# Altium PCB waffling60-SE.PcbDoc (part 2 of 2)
Units mm, origin at the board's own origin, x right, y up, seen from the top; angles counter-clockwise.
Board outline 283.9 x 96.45 mm, 2 copper layers (Component Side, Bottom Layer), stack 1.571 mm thick; 161 components, 102 nets, 768 pads, 77 vias.
Unrouted connection lines stored in the file: 5.
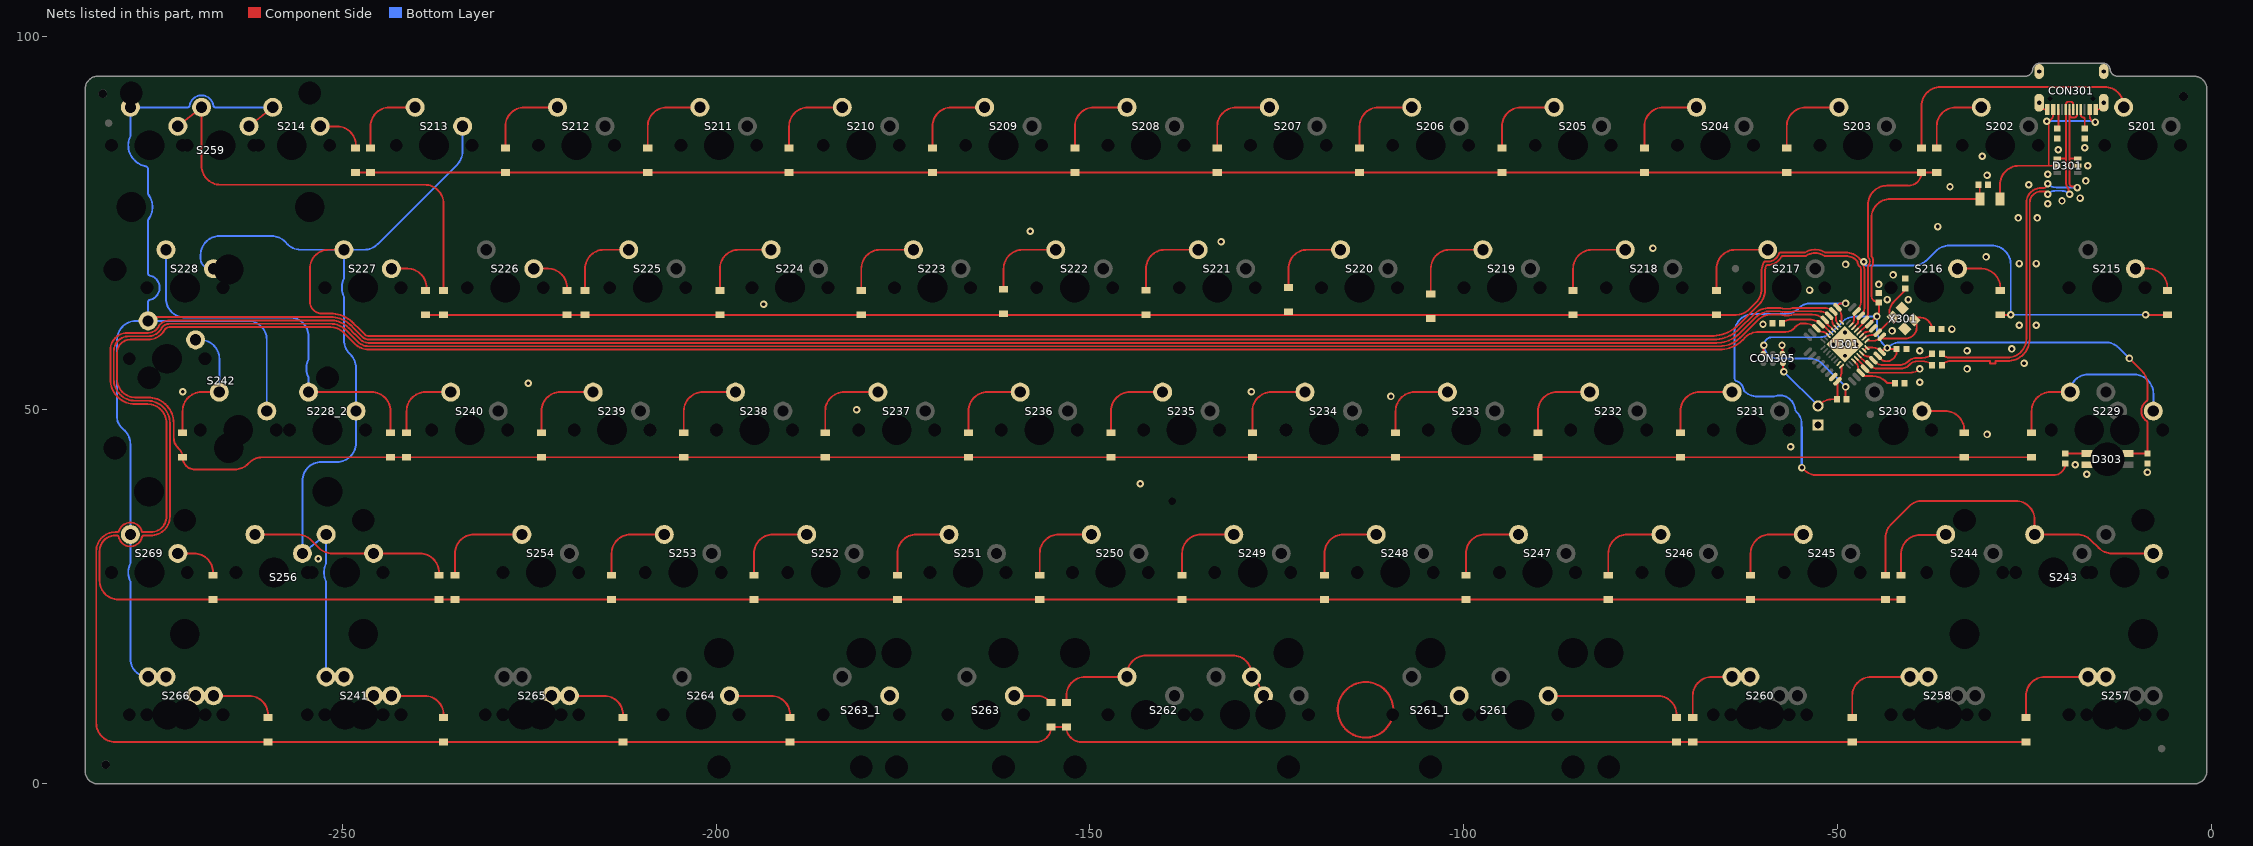
[diagram p2: the nets of this part, all layers, seen from the top]

## Via types
v1: diameter 1, hole 0.5, Component Side to Bottom Layer, tented both sides, 72 vias
v2: diameter 1, hole 0.5, Component Side to Bottom Layer, tented bottom, 5 vias

## Nets (pads, with @x,y where several pads share a name; then routed paths per layer and width w, separated by ;. In a path a pad name is that pad's centre, name@x,y a point inside that pad or via, vN(x,y) a via of type N, cw(c..) or ccw(c..) an arc to the next point about the centre after c; other vN are vias at no path point) (continued)
col13: S213.2 S227.2 S228.2 S228_2.2 S241.2 S256.2 U301.7 | length 354.3
  Component Side w0.254: -251.192,62.882 ccw(c-251.623,58.547) -251.586,62.903 ; S227.2@-249.815,71.445 -251.841,71.445 ccw(c-251.841,68.905) -254.381,68.905 -254.381,64.514 ccw(c-252.789,64.514) -252.789,62.921 ccw(c-252.694,63.157) -252.694,62.903 -251.623,62.903 cw(c-251.623,58.547) -251.586,62.903 ; U301.7@-48.171,61.379 -47.991,61.559 ccw(c-48.535,62.103) -47.765,62.103 -47.765,62.369 cw(c-46.615,62.369) U301.7@-47.428,63.182 ccw(c-48.922,64.676) -46.809,64.676 -46.809,68.526 ccw(c-48.895,68.526) -46.873,69.037 ccw(c-47.119,68.977) -46.97,69.182 cw(c-46.482,69.85) -47.307,69.798 ccw(c-47.561,69.781) -47.375,69.955 ccw(c-48.895,68.526) -48.895,70.612 -51.66,70.612 cw(c-51.66,70.866) -51.8,70.655 ccw(c-52.965,68.905) -54.13,70.655 cw(c-54.27,70.866) -54.27,70.612 -57.281,70.612 ccw(c-57.282,70.358) -57.506,70.478 cw(c-59.315,71.445) -59.328,69.394 ccw(c-59.33,69.14) -59.569,69.226 ccw(c-57.604,68.526) -59.69,68.526 -59.69,65.97 cw(c-62.23,65.97) -60.434,64.174 -63.172,61.436 cw(c-66.895,65.158) -66.895,59.894 -246.51,59.894 cw(c-246.51,60.618) -246.851,59.98 cw(c-246.51,60.618) -247.022,60.106 -247.699,60.784 -248.542,61.626 ccw(c-251.623,58.547) -249.477,62.338 ccw(c-251.623,58.547) -249.66,62.436 ccw(c-251.623,58.547) -249.662,62.436 ccw(c-251.623,58.547) -251.586,62.903
  Bottom Layer w0.254: S228.2@-267.277,68.905 -267.66,68.905 cw(c-267.66,70.231) -268.986,70.231 -268.986,70.739 cw(c-266.446,70.739) -266.446,73.279 -259.497,73.279 cw(c-259.497,70.739) -257.701,72.535 -257.302,72.136 ccw(c-255.634,73.804) -255.634,71.445 S227.2@-249.815,71.445 ; S241.2@-252.195,14.295 -252.195,26.968 ccw(c-252.449,26.969) -252.219,27.076 cw(c-249.655,28.265) -252.219,29.454 ccw(c-252.449,29.561) -252.195,29.562 S256.2@-252.195,33.345 -255.269,30.886 S256.2@-255.37,30.805 -255.37,40.513 cw(c-252.83,40.513) -252.83,43.053 -250.742,43.053 ccw(c-250.742,45.593) -248.202,45.593 S228_2.2@-248.202,49.855 -248.202,55.634 ccw(c-250.742,55.634) -248.946,57.43 -249.071,57.555 cw(c-247.275,59.351) -249.815,59.351 -249.815,65.068 ccw(c-250.069,65.069) -249.839,65.176 cw(c-247.275,66.365) -249.839,67.554 ccw(c-250.069,67.661) -249.815,67.662 S227.2@-249.815,71.445 ; S213.2@-233.94,87.955 -233.94,84.612 cw(c-236.48,84.612) -234.684,82.816 -245.311,72.189 cw(c-247.107,73.985) -247.107,71.445 S227.2@-249.815,71.445
col14: S214.2 S242.2 S259.2 S266.2 S269.2 U301.10 | length 366.5
  Component Side w0.254: S242.2@-276.02,61.925 cw(c-275.496,61.925) -275.496,62.449 -251.623,62.449 cw(c-251.623,58.547) -250.641,62.323 cw(c-251.623,58.547) -248.863,61.305 -248.592,61.034 -247.342,59.784 ccw(c-246.51,60.618) -247.329,59.772 ccw(c-246.51,60.618) -246.51,59.44 -66.518,59.44 ccw(c-66.518,64.25) -63.119,60.847 ccw(c-66.518,64.25) -63.117,60.849 -61.209,62.757 ; S259.2@-262.515,87.955 S214.2@-259.34,90.495 ; -61.209,62.757 cw(c-59.017,60.565) -59.017,63.665 -57.647,63.665 cw(c-57.646,63.411) -57.574,63.655 ccw(c-56.775,66.365) -55.976,63.655 cw(c-55.904,63.411) -55.903,63.665 -51.706,63.665 cw(c-51.706,62.015) U301.10@-50.54,63.182 cw(c-51.444,62.277) -50.165,62.277 -50.165,62.103 ccw(c-49.304,62.103) -49.913,61.494 U301.10@-49.797,61.379
  Bottom Layer w0.254: -276.02,82.174 -276.02,81.534 -276.02,78.963 ccw(c-275.766,78.963) -275.972,78.814 cw(c-278.263,77.16) -275.972,75.506 ccw(c-275.766,75.357) -276.02,75.357 -276.02,68.26 ccw(c-275.766,68.26) -275.819,68.011 cw(c-276.167,66.365) -275.819,64.719 ccw(c-275.766,64.47) -276.02,64.47 S242.2@-276.02,61.925 ; -276.02,82.175 ccw(c-276.486,82.174) -276.335,82.615 ; S266.2@-276.008,14.295 cw(c-276.008,16.671) -278.384,16.671 -278.384,26.955 ccw(c-278.638,26.956) -278.408,27.064 cw(c-275.85,28.265) -278.408,29.466 ccw(c-278.638,29.574) -278.384,29.575 -278.384,33.345 S269.2@-278.39,33.345 -278.39,45.436 ccw(c-280.93,45.436) -279.134,47.232 -279.654,47.752 cw(c-278.428,48.978) -280.162,48.978 -280.162,59.385 cw(c-277.622,59.385) -277.622,61.925 S242.2@-276.02,61.925 ; S242.2@-260.14,49.855 -260.14,59.385 ccw(c-262.68,59.385) -262.68,61.925 S242.2@-276.02,61.925 ; S214.2@-259.34,90.495 -267.032,90.495 cw(c-267.032,90.749) -267.283,90.714 ccw(c-268.865,90.495) -270.447,90.714 cw(c-270.698,90.749) -270.698,90.495 S259.2@-278.39,90.495 -278.39,86.712 cw(c-278.644,86.711) -278.414,86.604 ccw(c-275.85,85.415) -277.591,83.189 cw(c-277.747,82.989) -277.58,83.18 ccw(c-276.02,84.964) -276.486,82.641 ; -276.486,82.641 ccw(c-276.02,84.964) -276.335,82.615 ; -276.486,82.641 cw(c-276.486,82.174) -276.335,82.615
D_N: CON301.A7 CON301.B7 D301.3 R305.2 | length 54.6
  Component Side w0.254: R305.2@-36.001,57.531 -35.851,57.381 ccw(c-34.925,58.308) -34.925,56.998 -27.254,56.998 ccw(c-27.254,59.538) -24.714,59.538 -24.714,77.724 cw(c-22.733,77.724) -22.733,79.705 -22.403,79.705 ccw(c-22.403,80.264) v1(-21.844,80.264) ; CON301.A7@-18.946,90.174 -18.946,83.627 ; CON301.A7@-18.925,90.195 cw(c-19.156,90.09) -18.902,90.09 -18.902,89.47 ccw(c-18.575,89.47) -18.575,89.143 -18.275,89.143 ccw(c-18.275,89.47) -17.948,89.47 -17.948,90.09 cw(c-17.694,90.09) CON301.B7@-17.925,90.195 ; v1(-17.907,79.756) ccw(c-18.252,79.411) -18.252,79.899 -18.527,79.899 cw(c-18.527,80.279) -18.796,80.01 cw(c-18.433,80.373) -18.946,80.373 -18.946,83.627 ; D301.3@-17.802,83.627 -18.946,83.627
  Bottom Layer w0.254: v1(-21.844,80.264) ccw(c-20.71,81.398) -20.71,79.794 -17.999,79.794 cw(c-17.999,79.664) v1(-17.907,79.756)
D_P: CON301.A6 CON301.B6 D301.4 R306.2 | length 54.6
  Component Side w0.254: R306.2@-36.001,56.007 -35.851,56.157 cw(c-34.925,55.23) -34.925,56.54 -30.48,56.54 -29.591,56.54 -29.591,56.195 -28.829,56.195 -28.829,56.54 -27.94,56.54 -27.254,56.54 ccw(c-27.254,59.538) -24.257,59.538 -24.257,77.724 cw(c-22.733,77.724) -22.733,79.248 -22.225,79.248 cw(c-22.225,78.867) v1(-21.844,78.867) ; D301.4@-20.552,83.627 -19.404,83.627 ; v1(-18.923,78.867) cw(c-18.578,79.212) -19.066,79.212 -19.066,79.557 ccw(c-19.249,79.557) -19.119,79.687 -19.12,79.688 cw(c-18.436,80.372) -19.404,80.372 -19.404,83.627 ; CON301.A6@-18.425,90.195 cw(c-18.194,90.301) -18.448,90.301 -18.448,90.92 ccw(c-18.775,90.92) -18.775,91.247 -19.075,91.247 ccw(c-19.075,90.92) -19.402,90.92 -19.402,90.302 cw(c-19.656,90.301) CON301.B6@-19.425,90.195 cw(c-19.425,90.174) -19.404,90.174 -19.404,83.627
  Bottom Layer w0.254: v1(-21.844,78.867) cw(c-20.71,77.733) -20.71,79.337 -20.057,79.337 cw(c-20.057,77.733) v1(-18.923,78.867)
D_PRE_N: R305.1 U301.30 | length 10.4
  Component Side w0.254: U301.30@-46.757,57.631 -46.579,57.453 ccw(c-45.847,58.185) -45.847,57.15 cw(c-45.847,56.648) -45.492,57.003 U301.30@-45.166,56.676 -44.888,56.399 ccw(c-43.942,57.345) -43.942,56.007 -41.704,56.007 ccw(c-41.704,57.655) -40.538,56.49 cw(c-39.373,55.324) -39.373,56.972 -38.65,56.972 ccw(c-38.65,58.88) R305.1@-37.301,57.531
D_PRE_P: R306.1 U301.29 | length 10.9
  Component Side w0.254: U301.29@-47.11,57.277 -46.093,56.261 ccw(c-45.731,56.623) U301.29@-45.731,56.111 -45.451,55.83 ccw(c-44.774,56.507) -44.774,55.55 -41.514,55.55 ccw(c-41.514,57.198) -40.349,56.032 -40.215,56.166 cw(c-39.373,55.325) -39.373,56.515 -38.527,56.515 cw(c-38.527,54.781) R306.1@-37.301,56.007
GND: C301.1 C302.1 C303.1 C304.1 C305.1 C306.1 C307.1 CON301.A1B12 CON301.B1A12 CON301.S1 CON303.1 CON305.6 D301.2 D303.3 R302.2 R303.2 R304.2 S261_1.@-109.479,9.215 U301.3 U301.28 X301.2 X301.4 | length 39
  Component Side w0.254: CON305.6@-57.357,57.531 v1@-57.357,58.213 ; U301.28@-47.464,56.924 U301.28@-46.447,55.907 ; U301.3@-46.757,59.964 -46.388,60.333 cw(c-46.101,60.046) -46.101,60.452 ccw(c-46.101,61.583) -45.302,60.783 U301.3@-45.166,60.919 ; U301.28@-46.447,55.907 cw(c-46.809,55.545) U301.28@-46.297,55.545 -45.737,54.985 -40.229,54.985 ccw(c-40.229,56.739) v1(-38.989,55.499) ; CON301.S1@-22.995,91.11 ccw(c-22.08,91.11) -22.08,90.195 CON301.B1A12@-21.925,90.195 ; v1(-18.161,42.672) v1@-18.034,42.672 ; D303.3@-16.319,42.624 cw(c-16.251,42.624) D303.3@-16.315,42.648 ; D303.3@-16.3,42.672 D303.3@-16.157,42.672 ; CON301.A1B12@-15.425,90.195 -15.27,90.195 ccw(c-15.27,91.11) CON301.S1@-14.355,91.11
  Component Side w0.279: -109.409,10.019 ccw(c-113.126,9.881) -109.408,10.005
  other v1: -253.238,30.099 -143.256,40.132 -16.637,41.402 -8.509,41.656 -56.261,45.085 -29.972,46.736 -181.229,50.038 -109.728,51.816 -271.399,52.451 -128.397,52.451 -225.171,53.594 -38.989,53.721 -32.639,55.499 -25.019,56.261 -38.989,57.912 -32.639,57.912 -26.67,58.166 -57.404,58.674 -42.672,60.579 -34.671,60.833 -25.654,61.341 -23.368,61.341 -59.944,61.468 -193.675,64.135 -43.307,64.77 -40.513,64.77 -53.721,66.04 -44.45,66.802 -42.545,68.072 -48.895,69.469 -25.654,69.596 -23.368,69.596 -30.099,70.485 -74.676,71.628 -132.461,72.517 -157.988,73.914 -36.576,74.549 -25.781,75.692 -23.241,75.692 -21.844,77.597 -19.939,77.978 -17.526,78.359 -34.925,79.883 -24.384,80.137 -16.764,80.645 -29.972,81.407 -21.844,81.534 -16.51,82.677 -30.607,83.947 -20.447,84.836 -16.891,85.09
  other v2: -48.984,57.242 -50.54,58.798 -48.984,58.798 -47.428,58.798 -48.984,60.353
LED: R307.2 U301.9 | length 86.3
  Component Side w0.254: v1(-54.737,42.291) -54.465,42.019 ccw(c-52.669,43.815) -52.669,41.275 -34.66,41.275 -21.075,41.275 ccw(c-21.075,42.85) R307.2@-19.5,42.85 ; U301.9@-49.444,61.732 -49.444,62.467 ccw(c-51.254,62.467) U301.9@-49.974,63.747 cw(c-49.459,63.747) -49.459,64.262 v1(-48.895,64.262)
  Bottom Layer w0.254: -56.874,51.784 cw(c-56.833,52.035) -56.928,51.799 ; v1@-54.863,42.596 ccw(c-55.065,42.798) -54.78,42.798 -54.78,48.212 ccw(c-56.839,48.212) -55.383,49.668 cw(c-54.232,50.819) -55.595,49.929 cw(c-55.381,50.066) -55.634,50.044 ccw(c-57.727,49.855) -55.859,50.818 ccw(c-57.727,49.855) -56.928,51.799 ; v1(-54.737,42.291) -54.737,47.752 ; v1(-48.895,64.262) -53.765,64.262 ccw(c-53.765,62.528) -54.991,63.754 -55.136,63.609 cw(c-56.932,65.405) -56.932,62.865 -61.211,62.865 ccw(c-61.211,60.325) -63.751,60.325 -63.751,54.31 ccw(c-63.092,54.31) -63.69,54.033 ccw(c-63.459,54.14) -63.544,53.9 cw(c-64.077,52.395) -63.094,53.653 cw(c-64.077,52.395) -63.092,53.652 cw(c-64.077,52.395) -62.498,52.63 ccw(c-62.247,52.667) -62.419,52.481 ccw(c-60.706,54.356) -60.706,51.816 -58.53,51.816 ccw(c-58.53,52.07) -58.443,51.831 cw(c-57.727,49.855) -56.93,51.8 cw(c-57.727,49.855) -56.928,51.799
NetC301_2: C301.2 U301.27 | length 6.9
  Component Side w0.254: U301.27@-47.817,56.57 -47.417,56.17 cw(c-47.833,55.753) -47.244,55.753 ccw(c-46.297,55.753) -46.967,55.083 U301.27@-46.863,54.979 -46.414,54.531 -45.287,54.531 cw(c-45.287,51.995) -43.493,53.787 -43.374,53.668 ccw(c-43.195,53.848) -43.195,53.594 C301.2@-42.306,53.594
NetC305_2: C305.2 U301.2 X301.3 | length 9.8
  Component Side w0.254: U301.2@-46.403,59.611 -46.373,59.641 cw(c-45.466,58.734) -45.466,60.017 -45.413,60.017 ccw(c-45.413,61.167) U301.2@-44.6,60.353 -42.571,62.363 X301.3@-42.527,62.407 cw(c-42.527,62.933) -43.053,62.933 cw(c-40.764,62.933) -42.383,64.551 -41.023,65.911 ccw(c-41.336,66.223) C305.2@-40.894,66.223
NetC306_2: C306.2 U301.1 X301.1 | length 12.4
  Component Side w0.254: U301.1@-46.05,59.257 -45.315,59.257 ccw(c-45.315,61.068) U301.1@-44.034,59.788 ccw(c-43.81,59.788) -43.81,59.563 -40.897,59.563 ccw(c-40.897,61.09) -39.37,61.09 ccw(c-40.733,61.09) X301.1@-39.769,62.053 ; X301.1@-39.769,62.053 cw(c-39.465,62.053) -39.465,62.357 -38.877,62.357 cw(c-38.877,60.833) C306.2@-37.353,60.833
NetCON301_A5: CON301.A5 R303.1 | length 2.8
  Component Side w0.254: CON301.A5@-17.425,90.195 cw(c-17.656,90.09) -17.402,90.09 -17.402,89.47 ccw(c-17.075,89.47) -17.114,89.146 cw(c-17.145,88.894) -16.891,88.892 R303.1@-16.891,87.645
NetCON301_B5: CON301.B5 R304.1 | length 2.6
  Component Side w0.254: R304.1@-20.574,87.645 ccw(c-20.574,87.794) -20.425,87.794 CON301.B5@-20.425,90.195
NetD201_1: D201.1 S201.1 | length 36.6
  Component Side w0.254: D201.1@-38.735,85.05 -38.735,90.678 cw(c-36.195,90.678) -36.195,93.218 -14.23,93.218 cw(c-14.23,90.678) -11.69,90.678 S201.1@-11.69,90.495 ccw(c-12.254,90.495) S201.1@-12.254,91.059
NetD202_1: D202.1 S202.1 | length 10.3
  Component Side w0.254: D202.1@-36.703,85.05 -36.703,87.955 cw(c-34.163,87.955) -34.163,90.495 S202.1@-30.74,90.495
NetD203_1: D203.1 S203.1 | length 11.3
  Component Side w0.254: D203.1@-56.769,85.05 -56.769,87.955 cw(c-54.229,87.955) -54.229,90.495 S203.1@-49.79,90.495
NetD204_1: D204.1 S204.1 | length 11.3
  Component Side w0.254: D204.1@-75.819,85.05 -75.819,87.955 cw(c-73.279,87.955) -73.279,90.495 S204.1@-68.84,90.495
NetD205_1: D205.1 S205.1 | length 11.3
  Component Side w0.254: D205.1@-94.869,85.05 -94.869,87.955 cw(c-92.329,87.955) -92.329,90.495 S205.1@-87.89,90.495
NetD206_1: D206.1 S206.1 | length 11.3
  Component Side w0.254: D206.1@-113.919,85.05 -113.919,87.955 cw(c-111.379,87.955) -111.379,90.495 S206.1@-106.94,90.495
NetD207_1: D207.1 S207.1 | length 11.3
  Component Side w0.254: D207.1@-132.969,85.05 -132.969,87.955 cw(c-130.429,87.955) -130.429,90.495 S207.1@-125.99,90.495
NetD208_1: D208.1 S208.1 | length 11.3
  Component Side w0.254: D208.1@-152.019,85.05 -152.019,87.955 cw(c-149.479,87.955) -149.479,90.495 S208.1@-145.04,90.495
NetD209_1: D209.1 S209.1 | length 11.3
  Component Side w0.254: D209.1@-171.069,85.05 -171.069,87.955 cw(c-168.529,87.955) -168.529,90.495 S209.1@-164.09,90.495
NetD210_1: D210.1 S210.1 | length 11.5
  Component Side w0.254: D210.1@-190.246,85.05 -190.246,87.955 cw(c-187.706,87.955) -187.706,90.495 S210.1@-183.14,90.495
NetD211_1: D211.1 S211.1 | length 11.3
  Component Side w0.254: D211.1@-209.169,85.05 -209.169,87.955 cw(c-206.629,87.955) -206.629,90.495 S211.1@-202.19,90.495
NetD212_1: D212.1 S212.1 | length 11.3
  Component Side w0.254: D212.1@-228.219,85.05 -228.219,87.955 cw(c-225.679,87.955) -225.679,90.495 S212.1@-221.24,90.495
NetD213_1: D213.1 S213.1 | length 10.3
  Component Side w0.254: D213.1@-246.253,85.05 -246.253,87.955 cw(c-243.713,87.955) -243.713,90.495 S213.1@-240.29,90.495
NetD214_1: D214.1 S214.1 | length 6.6
  Component Side w0.254: S214.1@-252.99,87.955 -250.759,87.955 cw(c-250.759,85.415) -248.219,85.415 D214.1@-248.219,85.05
NetD215_1: D215.1 S215.1 | length 6.1
  Component Side w0.254: S215.1@-10.102,68.905 -8.382,68.905 cw(c-8.382,66.365) -5.842,66.365 D215.1@-5.842,66
NetD216_1: D216.1 S216.1 | length 7.5
  Component Side w0.254: S216.1@-33.915,68.905 -30.734,68.905 cw(c-30.734,66.365) -28.194,66.365 D216.1@-28.194,66
NetD217_1: D217.1 S217.1 | length 11.2
  Component Side w0.254: D217.1@-66.167,66 -66.167,68.905 cw(c-63.627,68.905) -63.627,71.445 S217.1@-59.315,71.445
NetD218_1: D218.1 S218.1 | length 11.3
  Component Side w0.254: D218.1@-85.344,66 -85.344,68.905 cw(c-82.804,68.905) -82.804,71.445 S218.1@-78.365,71.445
NetD219_1: D219.1 S219.1 | length 11.8
  Component Side w0.254: D219.1@-104.394,65.516 -104.394,68.905 cw(c-101.854,68.905) -101.854,71.445 S219.1@-97.415,71.445
NetD220_1: D220.1 S220.1 | length 10.9
  Component Side w0.254: D220.1@-123.444,66.405 -123.444,68.905 cw(c-120.904,68.905) -120.904,71.445 S220.1@-116.465,71.445
NetD221_1: D221.1 S221.1 | length 11.3
  Component Side w0.254: D221.1@-142.494,66.024 -142.494,68.905 cw(c-139.954,68.905) -139.954,71.445 S221.1@-135.515,71.445
NetD222_1: D222.1 S222.1 | length 11.2
  Component Side w0.254: D222.1@-161.544,66.151 -161.544,68.905 cw(c-159.004,68.905) -159.004,71.445 S222.1@-154.565,71.445
NetD223_1: D223.1 S223.1 | length 11.3
  Component Side w0.254: D223.1@-180.594,66 -180.594,68.905 cw(c-178.054,68.905) -178.054,71.445 S223.1@-173.615,71.445
NetD224_1: D224.1 S224.1 | length 11.2
  Component Side w0.254: D224.1@-199.517,66 -199.517,68.905 cw(c-196.977,68.905) -196.977,71.445 S224.1@-192.665,71.445
NetD225_1: D225.1 S225.1 | length 10.2
  Component Side w0.254: D225.1@-217.551,66 -217.551,68.905 cw(c-215.011,68.905) -215.011,71.445 S225.1@-211.715,71.445
NetD226_1: D226.1 S226.1 | length 6.3
  Component Side w0.254: S226.1@-224.415,68.905 -222.504,68.905 cw(c-222.504,66.365) -219.964,66.365 D226.1@-219.964,66
NetD227_1: D227.1 S227.1 | length 6.5
  Component Side w0.254: S227.1@-243.465,68.905 -241.3,68.905 cw(c-241.3,66.365) -238.76,66.365 D227.1@-238.76,66
NetD228_1: D228.1 S259.1 | length 59.4
  Component Side w0.254: S259.1@-272.04,87.955 S259.1@-268.865,90.495 -268.865,82.677 ccw(c-266.325,82.677) -266.325,80.137 -239.014,80.137 cw(c-239.014,77.597) -236.474,77.597 D228.1@-236.474,66
  Bottom Layer w0.254: S259.1@-269.5,90.495 S259.1@-268.865,90.495
NetD229_1: D229.1 S229.1 | length 25.8
  Component Side w0.254: D229.1@-24.003,46.95 -24.003,49.855 cw(c-21.463,49.855) -21.463,52.395 S229.1@-18.834,52.395
  Bottom Layer w0.254: S229.1@-18.834,52.395 cw(c-16.492,52.395) -16.492,54.737 -10.261,54.737 cw(c-10.261,52.197) -7.721,52.197 S229.1@-7.721,49.855
NetD230_1: D230.1 S230.1 | length 7.5
  Component Side w0.254: S230.1@-38.677,49.855 -35.56,49.855 cw(c-35.56,47.315) -33.02,47.315 D230.1@-33.02,46.95
NetD231_1: D231.1 S231.1 | length 11.3
  Component Side w0.254: D231.1@-70.993,46.95 -70.993,49.855 cw(c-68.453,49.855) -68.453,52.395 S231.1@-64.077,52.395
NetD232_1: D232.1 S232.1 | length 11.3
  Component Side w0.254: D232.1@-90.043,46.95 -90.043,49.855 cw(c-87.503,49.855) -87.503,52.395 S232.1@-83.127,52.395
NetD233_1: D233.1 S233.1 | length 11.3
  Component Side w0.254: D233.1@-109.093,46.95 -109.093,49.855 cw(c-106.553,49.855) -106.553,52.395 S233.1@-102.177,52.395
NetD234_1: D234.1 S234.1 | length 11.4
  Component Side w0.254: D234.1@-128.27,46.95 -128.27,49.855 cw(c-125.73,49.855) -125.73,52.395 S234.1@-121.227,52.395
NetD235_1: D235.1 S235.1 | length 11.3
  Component Side w0.254: D235.1@-147.193,46.95 -147.193,49.855 cw(c-144.653,49.855) -144.653,52.395 S235.1@-140.277,52.395
NetD236_1: D236.1 S236.1 | length 11.3
  Component Side w0.254: D236.1@-166.243,46.95 -166.243,49.855 cw(c-163.703,49.855) -163.703,52.395 S236.1@-159.327,52.395
NetD237_1: D237.1 S237.1 | length 11.4
  Component Side w0.254: D237.1@-185.42,46.95 -185.42,49.855 cw(c-182.88,49.855) -182.88,52.395 S237.1@-178.377,52.395
NetD238_1: D238.1 S238.1 | length 10.8
  Component Side w0.254: D238.1@-204.343,46.95 -204.343,49.855 cw(c-201.803,49.855) -201.803,52.395 S238.1@-197.881,52.395
NetD239_1: D239.1 S239.1 | length 11.3
  Component Side w0.254: D239.1@-223.393,46.95 -223.393,49.855 cw(c-220.853,49.855) -220.853,52.395 S239.1@-216.477,52.395
NetD240_1: D240.1 S240.1 | length 10.3
  Component Side w0.254: D240.1@-241.427,46.95 -241.427,49.855 cw(c-238.887,49.855) -238.887,52.395 S240.1@-235.527,52.395
NetD241_1: D241.1 S242.1 | length 18.3
  Component Side w0.254: D241.1@-271.399,46.95 -271.399,49.855 cw(c-268.859,49.855) -268.859,52.395 S242.1@-266.49,52.395
  Bottom Layer w0.254: S242.1@-269.67,59.385 -269.03,59.385 cw(c-269.03,56.845) -266.49,56.845 S242.1@-266.49,52.395
NetD242_1: D242.1 S228.1 S228_2.1 | length 51.3
  Component Side w0.254: S228_2.1@-254.552,52.395 -246.126,52.395 cw(c-246.126,49.855) -243.586,49.855 D242.1@-243.586,46.95
  Bottom Layer w0.254: S228.1@-273.627,71.445 -273.627,64.919 ccw(c-271.087,64.919) -271.087,62.379 -257.092,62.379 cw(c-257.092,59.839) -254.552,59.839 -254.552,56.867 cw(c-254.806,56.866) -254.576,56.759 ccw(c-252.012,55.57) -254.576,54.381 cw(c-254.806,54.274) -254.552,54.273 S228_2.1@-254.552,52.395
NetD243_1: D243.1 S243.1 | length 47.5
  Component Side w0.254: D243.1@-43.561,27.9 -43.561,32.893 cw(c-41.021,32.893) -42.878,34.626 -40.402,37.102 cw(c-38.606,35.306) -38.606,37.846 -26.136,37.846 cw(c-26.136,35.306) -23.596,35.306 S243.1@-23.596,33.345 -17.887,33.345 cw(c-17.887,30.805) -16.091,32.601 -15.039,31.549 ccw(c-13.243,33.345) -13.243,30.805 S243.1@-7.721,30.805
NetD244_1: D244.1 S244.2 | length 10.3
  Component Side w0.254: D244.1@-41.468,27.9 -41.468,30.734 cw(c-38.928,30.734) -38.928,33.274 S244.2@-35.433,33.274
NetD245_1: D245.1 S245.1 | length 11.4
  Component Side w0.254: D245.1@-61.595,27.9 -61.595,30.805 cw(c-59.055,30.805) -59.055,33.345 S245.1@-54.552,33.345
NetD246_1: D246.1 S246.1 | length 11.4
  Component Side w0.254: D246.1@-80.645,27.9 -80.645,30.805 cw(c-78.105,30.805) -78.105,33.345 S246.1@-73.602,33.345
NetD247_1: D247.1 S247.1 | length 11.4
  Component Side w0.254: D247.1@-99.695,27.9 -99.695,30.805 cw(c-97.155,30.805) -97.155,33.345 S247.1@-92.652,33.345
NetD248_1: D248.1 S248.1 | length 11.3
  Component Side w0.254: D248.1@-118.618,27.9 -118.618,30.805 cw(c-116.078,30.805) -116.078,33.345 S248.1@-111.702,33.345
NetD249_1: D249.1 S249.1 | length 12.5
  Component Side w0.254: D249.1@-137.668,27.9 -137.668,30.805 cw(c-135.128,30.805) -135.128,33.345 S249.1@-130.752,33.345
  Bottom Layer w0.254: S249.1@-130.752,33.345 S249.1@-130.752,34.544
NetD250_1: D250.1 S250.1 | length 11.3
  Component Side w0.254: D250.1@-156.718,27.9 -156.718,30.805 cw(c-154.178,30.805) -154.178,33.345 S250.1@-149.802,33.345
NetD251_1: D251.1 S251.1 | length 11.3
  Component Side w0.254: D251.1@-175.768,27.9 -175.768,30.805 cw(c-173.228,30.805) -173.228,33.345 S251.1@-168.852,33.345
NetD252_1: D252.1 S252.1 | length 11.4
  Component Side w0.254: D252.1@-194.945,27.9 -194.945,30.805 cw(c-192.405,30.805) -192.405,33.345 S252.1@-187.902,33.345
NetD253_1: D253.1 S253.1 | length 11.4
  Component Side w0.254: D253.1@-213.995,27.9 -213.995,30.805 cw(c-211.455,30.805) -211.455,33.345 S253.1@-206.952,33.345
NetD254_1: D254.1 S254.1 | length 13.3
  Component Side w0.254: D254.1@-234.95,27.9 -234.95,30.805 cw(c-232.41,30.805) -232.41,33.345 S254.1@-226.002,33.345
NetD255_1: D255.1 S256.1 | length 27.2
  Component Side w0.254: S256.1@-261.62,33.345 -256.012,33.345 cw(c-256.012,30.805) -254.216,32.601 -253.164,31.549 ccw(c-251.368,33.345) -251.368,30.805 -245.745,30.805 -239.649,30.805 cw(c-239.649,28.265) -237.109,28.265 D255.1@-237.109,27.9
NetD256_1: D256.1 S269.1 | length 6.5
  Component Side w0.254: S269.1@-272.04,30.805 -269.875,30.805 cw(c-269.875,28.265) -267.335,28.265 D256.1@-267.335,27.9
NetD257_1: D257.1 S257.2 | length 12.7
  Component Side w0.254: D257.1@-24.765,8.85 -24.765,11.755 cw(c-22.225,11.755) -22.225,14.295 S257.2@-16.452,14.295
NetD258_1: D258.1 S258.2 | length 12.1
  Component Side w0.254: D258.1@-48.006,8.85 -48.006,11.755 cw(c-45.466,11.755) -45.466,14.295 S258.2@-40.264,14.295
NetD259_1: D259.1 S260.2 | length 9.6
  Component Side w0.254: D259.1@-69.342,8.85 -69.342,11.755 cw(c-66.802,11.755) -66.802,14.295 S260.2@-64.077,14.295
NetD260_1: D260.1 S261.1 S261_1.1 | length 19
  Component Side w0.254: S261.1@-88.683,11.755 -74.041,11.755 cw(c-74.041,9.215) -73.914,11.752 cw(c-74.041,9.215) -71.501,9.215 D260.1@-71.501,8.85
NetD261_1: D261.1 S262.2 | length 34
  Component Side w0.254: D261.1@-153.162,10.85 -153.162,11.755 cw(c-150.622,11.755) -150.622,14.295 S262.2@-145.039,14.295 -145.039,14.605 cw(c-142.499,14.605) -142.499,17.145 -130.903,17.145 cw(c-130.903,14.605) -128.363,14.605 S262.2@-128.363,14.295 -127.837,13.769 cw(c-129.633,11.973) -127.093,11.973 S262.2@-127.093,11.755
  Bottom Layer w0.254: S262.2@-145.039,14.295 S262.2@-145.039,14.478 ; S262.2@-128.363,14.295 S262.2@-128.363,14.478
NetD262_1: D262.1 S263.1 S263_1.1 | length 5.2
  Component Side w0.254: S263.1@-160.121,11.755 -157.151,11.755 cw(c-157.151,9.215) -155.355,11.011 D262.1@-155.194,10.85
NetD263_1: D263.1 S264.1 | length 9.9
  Component Side w0.254: S264.1@-198.221,11.755 -192.659,11.755 cw(c-192.659,9.215) -190.119,9.215 D263.1@-190.119,8.85
NetD264_1: D264.1 S265.1 | length 9
  Component Side w0.254: S265.1@-219.652,11.755 -215.011,11.755 cw(c-215.011,9.215) -212.471,9.215 D264.1@-212.471,8.85
NetD265_1: D265.1 S241.1 | length 8.8
  Component Side w0.254: S241.1@-243.464,11.755 -239.014,11.755 cw(c-239.014,9.215) -236.474,9.215 D265.1@-236.474,8.85
NetD266_1: D266.1 S266.1 | length 9.1
  Component Side w0.254: S266.1@-267.277,11.755 -262.509,11.755 cw(c-262.509,9.215) -259.969,9.215 D266.1@-259.969,8.85
NetD303_4: D303.4 R307.1 | length 3.4
  Component Side w0.254: R307.1@-19.558,44.084 cw(c-19.346,43.872) -19.346,44.172 D303.4@-16.157,44.172
NetR302_1: R302.1 U301.13 | length 7.3
  Component Side w0.254: R302.1@-57.389,61.595 cw(c-56.163,60.369) -56.163,62.103 -53.729,62.103 cw(c-53.729,59.992) U301.13@-52.237,61.485 cw(c-52.237,60.973) -51.875,61.335 U301.13@-50.858,60.318
NetU301_23: U301.23
RAW: CON301.A4B9 CON301.B4A9 D301.5 F301.2 | length 28.1
  Component Side w0.254: F301.2@-28.241,78.232 -28.241,80.137 cw(c-25.701,80.137) -25.701,82.677 -21.717,82.677 ; CON301.B4A9@-21.125,90.195 -21.125,89.492 cw(c-21.971,89.492) v1(-21.971,88.646) cw(c-21.971,88.392) -21.717,88.392 -21.717,82.677 ; D301.5@-20.298,82.677 D301.5@-20.552,82.677 -21.717,82.677 ; CON301.A4B9@-16.225,90.195 -16.225,89.25 ccw(c-15.494,89.25) v1(-15.494,88.519)
  Bottom Layer w0.254: v1(-21.971,88.646) -15.621,88.646 v1(-15.494,88.519)
row1: D201.2 D202.2 D203.2 D204.2 D205.2 D206.2 D207.2 D208.2 D209.2 D210.2 D211.2 D212.2 D213.2 D214.2 U301.5 | length 238.6
  Component Side w0.254: D214.2@-248.285,81.78 D213.2@-246.253,81.78 D212.2@-228.219,81.78 D208.2@-152.019,81.78 D207.2@-132.969,81.78 D206.2@-113.919,81.78 D205.2@-94.869,81.78 D203.2@-56.769,81.78 D201.2@-38.855,81.78 ; U301.5@-47.464,60.672 -46.447,61.688 ccw(c-46.809,62.05) U301.5@-46.297,62.05 ; U301.5@-46.297,62.051 ccw(c-47.253,63.006) -45.901,63.006 -45.901,66.675 -45.901,69.163 cw(c-45.647,69.163) -45.843,69.325 ccw(c-46.482,69.85) -45.843,70.375 cw(c-45.647,70.537) -45.901,70.537 -45.901,77.47 cw(c-43.361,77.47) -43.361,80.01 -41.275,80.01 -40.505,80.01 ccw(c-40.505,81.78) D201.2@-38.735,81.78 D202.2@-36.703,81.78
row2: D215.2 D216.2 D217.2 D218.2 D219.2 D220.2 D221.2 D222.2 D223.2 D224.2 D225.2 D226.2 D227.2 D228.2 U301.6 | length 259.1
  Component Side w0.254: D227.2@-238.76,62.73 D228.2@-236.474,62.73 D226.2@-219.964,62.73 D225.2@-217.551,62.73 D224.2@-199.517,62.73 D223.2@-180.594,62.73 D218.2@-85.344,62.73 D217.2@-66.167,62.73 -63.572,62.73 ccw(c-63.572,65.27) -61.776,63.474 -60.894,64.356 ccw(c-62.705,66.167) -60.144,66.167 -60.144,68.526 cw(c-57.604,68.526) -59.835,69.741 cw(c-59.612,69.618) -59.572,69.869 ccw(c-59.315,71.445) -57.814,70.9 cw(c-57.575,70.814) -57.604,71.066 -54.401,71.066 ccw(c-54.401,71.32) -54.271,71.102 cw(c-52.965,68.905) -51.659,71.102 ccw(c-51.529,71.32) -51.529,71.066 -48.895,71.066 cw(c-48.895,68.526) -46.355,68.526 -46.355,63.842 cw(c-48.088,63.842) -46.534,63.075 cw(c-48.088,63.842) -46.751,62.739 cw(c-48.088,63.842) U301.6@-46.863,62.616 -46.881,62.597 ccw(c-46.006,61.722) -47.244,61.722 cw(c-47.542,61.722) -47.331,61.511 U301.6@-47.817,61.025 ; D216.2@-28.194,62.73 v1@-26.797,62.73 ; v1(-8.763,62.738) -8.755,62.73 D215.2@-5.842,62.73
  Bottom Layer w0.254: v1(-46.482,69.85) ccw(c-45.847,69.85) -46.265,69.372 ccw(c-46.097,69.563) -46.053,69.313 cw(c-45.528,66.365) -45.528,69.359 -43.18,69.359 -39.77,69.359 ccw(c-39.77,71.899) -37.974,70.103 -36.812,71.265 cw(c-35.016,69.469) -35.016,72.009 -29.337,72.009 cw(c-29.337,69.469) -26.797,69.469 v1(-26.797,62.738) v1(-8.763,62.738)
row3: D229.2 D230.2 D231.2 D232.2 D233.2 D234.2 D235.2 D236.2 D237.2 D238.2 D239.2 D240.2 D241.2 D242.2 U301.14 | length 501.4
  Component Side w0.254: U301.14@-51.211,59.964 -51.526,60.279 ccw(c-51.943,59.863) -51.943,60.452 cw(c-51.943,61.399) -52.613,60.729 U301.14@-52.802,60.919 ccw(c-54.434,59.287) -52.803,60.92 ccw(c-54.434,59.287) -54.434,61.595 -54.548,61.595 ccw(c-54.548,60.202) -55.533,61.187 -55.821,60.9 cw(c-56.902,61.982) -56.896,60.452 -57.203,60.452 -60.536,60.452 ccw(c-60.536,57.912) -62.332,59.708 -62.686,59.354 cw(c-65.766,62.434) -62.737,59.304 cw(c-65.766,62.434) -63.497,58.716 cw(c-65.766,62.434) -65.766,58.078 -246.51,58.078 cw(c-246.51,60.618) -248.306,58.822 -249.827,60.343 ccw(c-251.623,58.547) -251.623,61.087 -273.139,61.087 ccw(c-273.139,60.22) -273.752,60.833 cw(c-276.009,61.92) -274.179,60.209 cw(c-276.009,61.92) -276.009,59.415 -278.405,59.415 ccw(c-278.405,57.658) -280.162,57.658 -280.162,54.102 ccw(c-277.749,54.102) -277.749,51.689 -276.038,51.689 cw(c-276.038,48.241) -272.59,48.241 -272.59,46.3 ccw(c-270.692,46.3) -272.034,44.958 -271.854,44.778 cw(c-272.951,43.68) D241.2@-271.399,43.68 ccw(c-269.756,43.68) -271.162,42.83 ccw(c-269.756,43.68) -269.756,42.037 -264.45,42.037 ccw(c-264.45,44.577) -262.654,42.781 -262.499,42.936 cw(c-260.703,41.14) -260.703,43.68 D240.2@-241.427,43.68 D239.2@-223.393,43.68 D238.2@-204.343,43.68 D237.2@-185.42,43.68 D232.2@-90.043,43.68 D231.2@-70.993,43.68 -24.265,43.68 -24.134,43.811 D229.2@-24.003,43.68
row4: D243.2 D244.2 D245.2 D246.2 D247.2 D248.2 D249.2 D250.2 D251.2 D252.2 D253.2 D254.2 D255.2 D256.2 U301.12 | length 522.2
  Component Side w0.254: U301.12@-50.504,60.672 -51.521,61.688 cw(c-51.159,62.05) U301.12@-51.671,62.05 ccw(c-53.377,60.345) -51.672,62.051 ccw(c-53.377,60.345) -53.377,62.757 -55.78,62.757 ccw(c-55.781,62.503) -55.845,62.749 cw(c-56.775,66.365) -57.705,62.749 ccw(c-57.769,62.503) -57.77,62.757 -58.873,62.757 ccw(c-58.873,60.217) -60.669,62.013 -63.007,59.675 cw(c-65.766,62.434) -63.008,59.674 cw(c-65.766,62.434) -65.766,58.532 -246.51,58.532 cw(c-246.51,60.618) -247.983,59.141 -248.345,59.503 -249.505,60.663 ccw(c-251.623,58.547) -251.623,61.541 -273.139,61.541 ccw(c-273.139,60.22) -274.074,61.153 ccw(c-273.752,60.833) -274.156,61.041 -274.205,60.945 -274.212,60.932 cw(c-276.009,61.92) -274.304,60.78 cw(c-276.009,61.92) -276.009,59.869 -278.593,59.869 ccw(c-278.593,57.846) -280.616,57.846 -280.616,54.102 ccw(c-277.749,54.102) -277.749,51.235 -276.098,51.235 cw(c-276.098,48.241) -273.104,48.241 -273.104,35.748 cw(c-275.644,35.748) -274.443,33.51 cw(c-275.644,35.748) -275.644,33.208 -276.58,33.208 ccw(c-276.581,32.954) -276.829,33.008 cw(c-278.39,33.345) -279.95,33.002 ccw(c-280.198,32.947) -280.198,33.201 -280.416,33.201 ccw(c-280.416,31.115) -280.894,33.146 ccw(c-280.416,31.115) -282.502,31.115 -282.502,27.17 ccw(c-279.962,27.17) -279.962,24.63 D256.2@-267.335,24.63 D255.2@-237.109,24.63 D254.2@-234.95,24.63 D253.2@-213.995,24.63 D252.2@-194.945,24.63 D251.2@-175.768,24.63 D250.2@-156.718,24.63 D249.2@-137.668,24.63 D248.2@-118.618,24.63 D247.2@-99.695,24.63 D246.2@-80.645,24.63 D245.2@-61.595,24.63 D243.2@-43.561,24.63 D244.2@-41.468,24.63
row5: D257.2 D258.2 D259.2 D260.2 D261.2 D262.2 D263.2 D264.2 D265.2 D266.2 U301.11 | length 561.9
  Component Side w0.254: -60.99,62.334 -63.062,60.262 cw(c-66.142,63.342) -66.142,58.986 -246.51,58.986 cw(c-246.51,60.618) -247.015,59.066 cw(c-246.51,60.618) -247.663,59.463 -248.309,60.109 -248.341,60.142 -249.185,60.985 ccw(c-251.623,58.547) -250.284,61.725 ccw(c-251.623,58.547) -251.623,61.995 -273.139,61.995 ccw(c-273.139,60.22) -274.395,61.474 ccw(c-273.752,60.833) -274.553,61.26 -274.627,61.122 -274.64,61.097 cw(c-276.009,61.92) -276.009,60.323 -278.781,60.323 ccw(c-278.781,58.034) -281.07,58.034 -281.07,54.102 ccw(c-277.749,54.102) -277.749,50.781 -276.098,50.781 cw(c-276.098,48.241) -273.558,48.241 -273.558,35.748 cw(c-275.644,35.748) -274.172,34.27 cw(c-275.644,35.748) -275.644,33.662 -276.825,33.662 ccw(c-278.39,33.345) -279.911,33.832 cw(c-280.153,33.909) -280.153,33.655 -280.416,33.655 ccw(c-280.416,31.115) -282.956,31.115 -282.956,8.12 ccw(c-280.416,8.12) -280.416,5.58 -178.429,5.58 cw(c-178.428,5.326) -178.414,5.58 ccw(c-178.189,9.76) -177.963,5.58 cw(c-177.949,5.326) -177.948,5.58 -157.194,5.58 ccw(c-157.194,7.58) D262.2@-155.194,7.58 D261.2@-153.162,7.58 ccw(c-151.17,7.58) -151.17,5.588 -104.648,5.588 -104.648,5.58 D260.2@-71.501,5.58 D259.2@-69.342,5.58 D258.2@-48.006,5.58 D257.2@-24.765,5.58 ; -60.989,62.335 cw(c-58.873,60.217) -58.873,63.211 -57.711,63.211 cw(c-57.709,62.957) -57.642,63.202 ccw(c-56.775,66.365) -55.908,63.202 cw(c-55.841,62.957) -55.839,63.211 -52.541,63.211 cw(c-52.541,61.18) U301.11@-51.105,62.616 ; U301.11@-51.105,62.616 -50.91,62.421 cw(c-51.481,61.849) -50.673,61.849 ccw(c-49.945,61.849) -50.46,61.334 U301.11@-50.151,61.025
RST: CON303.2 CON305.5 R301.2 U301.24 | length 15
  Component Side w0.254: CON305.5@-57.277,56.261 -57.277,55.245 v1(-57.15,55.118) ; CON303.2@-52.578,50.546 -52.433,50.691 cw(c-50.637,48.895) -50.637,51.435 R301.2@-50.053,51.435 -49.974,51.514 U301.24@-49.974,53.848 ccw(c-51.254,55.128) -49.444,55.128 U301.24@-49.444,55.863
  Bottom Layer w0.254: v1(-57.15,55.118) CON303.2@-52.578,50.546
VCC: C302.2 C303.2 C304.2 C307.2 CON305.2 D303.1 F301.1 R301.1 U301.4 U301.31 U301.32 | length 131.8
  Component Side w0.254: CON305.2@-59.897,57.531 -59.897,58.594 v1(-59.817,58.674) ; v1(-48.895,53.086) -48.895,51.801 -48.641,51.547 R301.1@-48.753,51.435 ; U301.4@-47.11,60.318 -46.093,61.335 cw(c-45.731,60.973) U301.4@-45.731,61.485 v1(-44.704,62.512) ccw(c-45.317,63.125) -44.45,63.125 C304.2@-44.45,64.374 cw(c-44.45,65.371) -45.447,65.371 -45.447,66.675 -45.447,69.017 cw(c-45.193,69.017) -45.406,69.154 ccw(c-46.482,69.85) -45.406,70.546 cw(c-45.193,70.683) -45.447,70.683 -45.447,72.39 -45.447,75.692 cw(c-42.907,75.692) -42.907,78.232 F301.1@-30.988,78.232 ; U301.31@-46.403,57.985 U301.32@-46.05,58.338 -45.315,58.338 cw(c-45.315,56.527) U301.32@-44.034,57.808 v1@-43.676,58.166 ; U301.31@-44.6,57.242 -44.183,56.825 ccw(c-43.434,57.574) -43.434,56.515 ccw(c-43.434,57.897) -42.052,57.897 C303.2@-42.052,58.166 v1@-43.307,58.166 ; C302.2@-31.13,80.137 cw(c-31.13,79.948) -30.941,79.948 F301.1@-30.941,78.232 ; D303.1@-11.557,44.172 D303.1@-11.107,44.172 C307.2@-8.5,44.172 ; v1(-10.922,56.896) -9.244,55.218 cw(c-11.04,53.422) -8.5,53.422 -8.5,51.392 cw(c-8.754,51.391) -8.612,51.18 ccw(c-7.721,49.855) -8.612,48.53 cw(c-8.754,48.319) -8.5,48.318 C307.2@-8.5,44.172 ; C307.2@-8.5,44.15 C307.2@-8.5,44.172
  Bottom Layer w0.254: v1(-48.895,53.086) -51.961,56.152 ccw(c-53.757,54.356) -53.757,56.896 -58.039,56.896 cw(c-58.039,58.674) v1(-59.817,58.674) cw(c-58.758,58.674) -58.758,59.733 -52.444,59.733 ccw(c-52.444,62.273) -50.648,60.477 -49.357,61.768 cw(c-47.561,59.972) -47.561,62.512 v1(-44.704,62.512) -44.704,60.742 ccw(c-42.164,60.742) -43.96,58.946 v1(-43.307,58.293) -43.289,58.311 cw(c-41.493,56.515) -41.493,59.055 -14.133,59.055 cw(c-14.133,56.515) -12.337,58.311 v1(-10.922,56.896)
pads on no net: CON301. CON301.A8 CON301.B8 CON305.0 D301.1 D301.6 D303. D303.2 FID1.0 FID2.0 FID3.0 FID4.0 S201. S202. S203. S204. S205. S206. S207. S208. S209. S210. S211. S212. S213. S214. S215. S216. S217. S218. S219. S220. S221. S222. S223. S224. S225. S226. S227. S228. S228_2. S229. S230. S231. S232. S233. S234. S235. S236. S237. S238. S239. S240. S241. S242. S243. S244. S245. S246. S247. S248. S249. S250. S251. S252. S253. S254. S256. S257. S258. S259. S260. S261. S261_1.@-85.349,2.23 S261_1.@-85.349,17.47 S261_1.@-99.319,9.215 S261_1.@-104.399,9.215 S261_1.@-123.449,2.23 S262. S263. S263_1.@-161.549,2.23 S263_1.@-175.519,9.215 S263_1.@-180.599,9.215 S263_1.@-185.679,9.215 S263_1.@-199.649,2.23 S263_1.@-199.649,17.47 S264. S265. S266. S269.
copper on no net: | length 0.8
  Component Side w0.254: -222.033,11.755 -221.463,12.325

## Polygon pours and split planes (outlines as drawn)
GND on Bottom Layer "Bottom Layer-No Net" (hatched 45Degree grid 1.397 track 0.203, remove dead copper, shelved, pour order 0): -284.45,1.715 -284.45,92.915 cw(c-282.7,92.915) -282.7,94.665 -24.85,94.665 ccw(c-24.85,95.665) -23.858,95.54 cw(c-22.866,95.415) -22.866,96.415 -14.484,96.415 cw(c-14.484,95.415) -13.492,95.54 ccw(c-12.5,95.665) -12.5,94.665 -2.3,94.665 cw(c-2.3,92.915) -0.55,92.915 -0.55,1.715 cw(c-2.3,1.715) -2.3,-0.035 -282.7,-0.035 cw(c-282.7,1.715)
GND on Component Side "Component Side-No Net" (hatched 45Degree grid 1.397 track 0.203, remove dead copper, shelved, pour order 1): -284.45,1.715 -284.45,92.915 cw(c-282.7,92.915) -282.7,94.665 -24.85,94.665 ccw(c-24.85,95.665) -23.858,95.54 cw(c-22.866,95.415) -22.866,96.415 -14.484,96.415 cw(c-14.484,95.415) -13.492,95.54 ccw(c-12.5,95.665) -12.5,94.665 -2.3,94.665 cw(c-2.3,92.915) -0.55,92.915 -0.55,1.715 cw(c-2.3,1.715) -2.3,-0.035 -282.7,-0.035 cw(c-282.7,1.715)

## Other copper
Component Side:
  pour cut-out: -282.7,94.215 cw(c-282.7,94.665) -282.7,95.115 -24.85,95.115 cw(c-24.85,94.665) -24.4,94.665 cw(c-24.85,94.665) -24.85,94.215
  pour cut-out: -284.9,1.715 ccw(c-282.7,1.715) -282.7,-0.485 -2.3,-0.485 ccw(c-2.3,1.715) -0.1,1.715 -0.1,92.915 ccw(c-2.3,92.915) -2.3,95.115 -12.5,95.115 cw(c-12.5,95.665) -13.045,95.595 cw(c-12.5,95.665) -13.045,95.596 cw(c-13.492,95.54) -13.045,95.595 -13.045,95.596 ccw(c-14.484,95.415) -14.484,96.865 -22.866,96.865 ccw(c-22.866,95.415) -24.305,95.596 cw(c-24.85,95.665) -24.305,95.595 cw(c-24.85,95.665) -24.85,95.115 ccw(c-24.85,94.665) -24.85,94.215 ccw(c-24.85,95.665) -23.411,95.484 ccw(c-23.858,95.54) -23.411,95.485 cw(c-22.866,95.415) -22.866,95.965 -14.484,95.965 cw(c-14.484,95.415) -13.939,95.485 cw(c-14.484,95.415) -13.939,95.484 cw(c-13.492,95.54) -13.939,95.485 -13.939,95.484 ccw(c-12.5,95.665) -12.5,94.215 -2.3,94.215 cw(c-2.3,92.915) -1,92.915 -1,1.715 cw(c-2.3,1.715) -2.3,0.415 -282.7,0.415 cw(c-282.7,1.715) -284,1.715 -284,92.915 cw(c-282.7,92.915) -282.7,94.215 ccw(c-282.7,94.665) -282.25,94.665 ccw(c-282.7,94.665) -282.7,95.115 ccw(c-282.7,92.915) -284.9,92.915
  pour cut-out: -269.55,-0.235 cw(c-269.55,0.215) -269.55,0.665 -189.05,0.665 cw(c-189.05,0.215) -188.6,0.215 cw(c-189.05,0.215) -189.05,-0.235
  region net GND: 1746 vertices and 2 holes, not listed, extent -116.144,6.751 -110.232,12.89
Bottom Layer:
  pour cut-out: -282.7,94.215 cw(c-282.7,94.665) -282.7,95.115 -24.85,95.115 cw(c-24.85,94.665) -24.4,94.665 cw(c-24.85,94.665) -24.85,94.215
  pour cut-out: -284.9,1.715 ccw(c-282.7,1.715) -282.7,-0.485 -2.3,-0.485 ccw(c-2.3,1.715) -0.1,1.715 -0.1,92.915 ccw(c-2.3,92.915) -2.3,95.115 -12.5,95.115 cw(c-12.5,95.665) -13.045,95.595 cw(c-12.5,95.665) -13.045,95.596 cw(c-13.492,95.54) -13.045,95.595 -13.045,95.596 ccw(c-14.484,95.415) -14.484,96.865 -22.866,96.865 ccw(c-22.866,95.415) -24.305,95.596 cw(c-24.85,95.665) -24.305,95.595 cw(c-24.85,95.665) -24.85,95.115 ccw(c-24.85,94.665) -24.85,94.215 ccw(c-24.85,95.665) -23.411,95.484 ccw(c-23.858,95.54) -23.411,95.485 cw(c-22.866,95.415) -22.866,95.965 -14.484,95.965 cw(c-14.484,95.415) -13.939,95.485 cw(c-14.484,95.415) -13.939,95.484 cw(c-13.492,95.54) -13.939,95.485 -13.939,95.484 ccw(c-12.5,95.665) -12.5,94.215 -2.3,94.215 cw(c-2.3,92.915) -1,92.915 -1,1.715 cw(c-2.3,1.715) -2.3,0.415 -282.7,0.415 cw(c-282.7,1.715) -284,1.715 -284,92.915 cw(c-282.7,92.915) -282.7,94.215 ccw(c-282.7,94.665) -282.25,94.665 ccw(c-282.7,94.665) -282.7,95.115 ccw(c-282.7,92.915) -284.9,92.915
  pour cut-out: -269.55,-0.235 cw(c-269.55,0.215) -269.55,0.665 -189.05,0.665 cw(c-189.05,0.215) -188.6,0.215 cw(c-189.05,0.215) -189.05,-0.235

## Silkscreen, mask and mechanical layers (free items; w line width, h text height)
Top Overlay:
  text "RST" at -55.118,50.292 h0.75 r270
  text "Waffling60 -C1" at -148.717,1.651 h3
  text "SE" at -134.62,1.27 h1.5
Top Solder:
  drawing of 2 lines, arcs and shapes, not listed
outline:
  the board outline again, w0.1
Mechanical 2:
  drawing of 677 lines, arcs and shapes, not listed
Mechanical 7:
  circle w0.013: c-9.15,85.415 r2.5
  lines w0.013: -22.675,97.915 -14.675,97.915 ; -18.675,96.415 -18.675,97.915 ; -284.45,1.715 ccw(c-282.7,1.715) -282.7,-0.035 -2.3,-0.035 ccw(c-2.3,1.715) -0.55,1.715 -0.55,92.915 ccw(c-2.3,92.915) -2.3,94.665 -12.5,94.665 cw(c-12.5,95.665) -13.492,95.54 ccw(c-14.484,95.415) -14.484,96.415 -22.866,96.415 ccw(c-22.866,95.415) -23.858,95.54 cw(c-24.85,95.665) -24.85,94.665 -282.7,94.665 ccw(c-282.7,92.915) -284.45,92.915 -284.45,1.715
Mechanical 13:
  lines w0.1: -284.45,1.715 ccw(c-282.7,1.715) -282.7,-0.035 -2.3,-0.035 ccw(c-2.3,1.715) -0.55,1.715 -0.55,92.915 ccw(c-2.3,92.915) -2.3,94.665 -12.5,94.665 cw(c-12.5,95.665) -13.492,95.54 ccw(c-14.484,95.415) -14.484,96.415 -22.866,96.415 ccw(c-22.866,95.415) -23.858,95.54 cw(c-24.85,95.665) -24.85,94.665 -282.7,94.665 ccw(c-282.7,92.915) -284.45,92.915 -284.45,1.715
  lines w0.2: -285.313,36.012 ccw(c-285.298,36.012) -285.298,35.997
Mechanical 16:
  drawing of 552 lines, arcs and shapes, not listed

## Text inside footprints (layer, text, board x,y; h text height)
CON301: Mechanical 15 "connector edge" at -15.725,97.445 h1 r180
S262: Mechanical 16 "7U" at -208.331,7.365 h1.52 r270; Mechanical 16 "6.25U" at -188.764,5.615 h1.52 r270